# Altium PCB AC616.PcbDoc
Units mil, origin at the board's own origin, x right, y up, seen from the top; angles counter-clockwise.
Board outline 2953.76 x 2520.69 mil, 8 copper layers (TOP, SGND, IN1, IN2, SVCC, IN3, SGND1, BOTTOM), stack 65.6 mil thick; 7 components, 274 nets, 189 pads, 0 vias.
Unrouted connection lines stored in the file: 36.
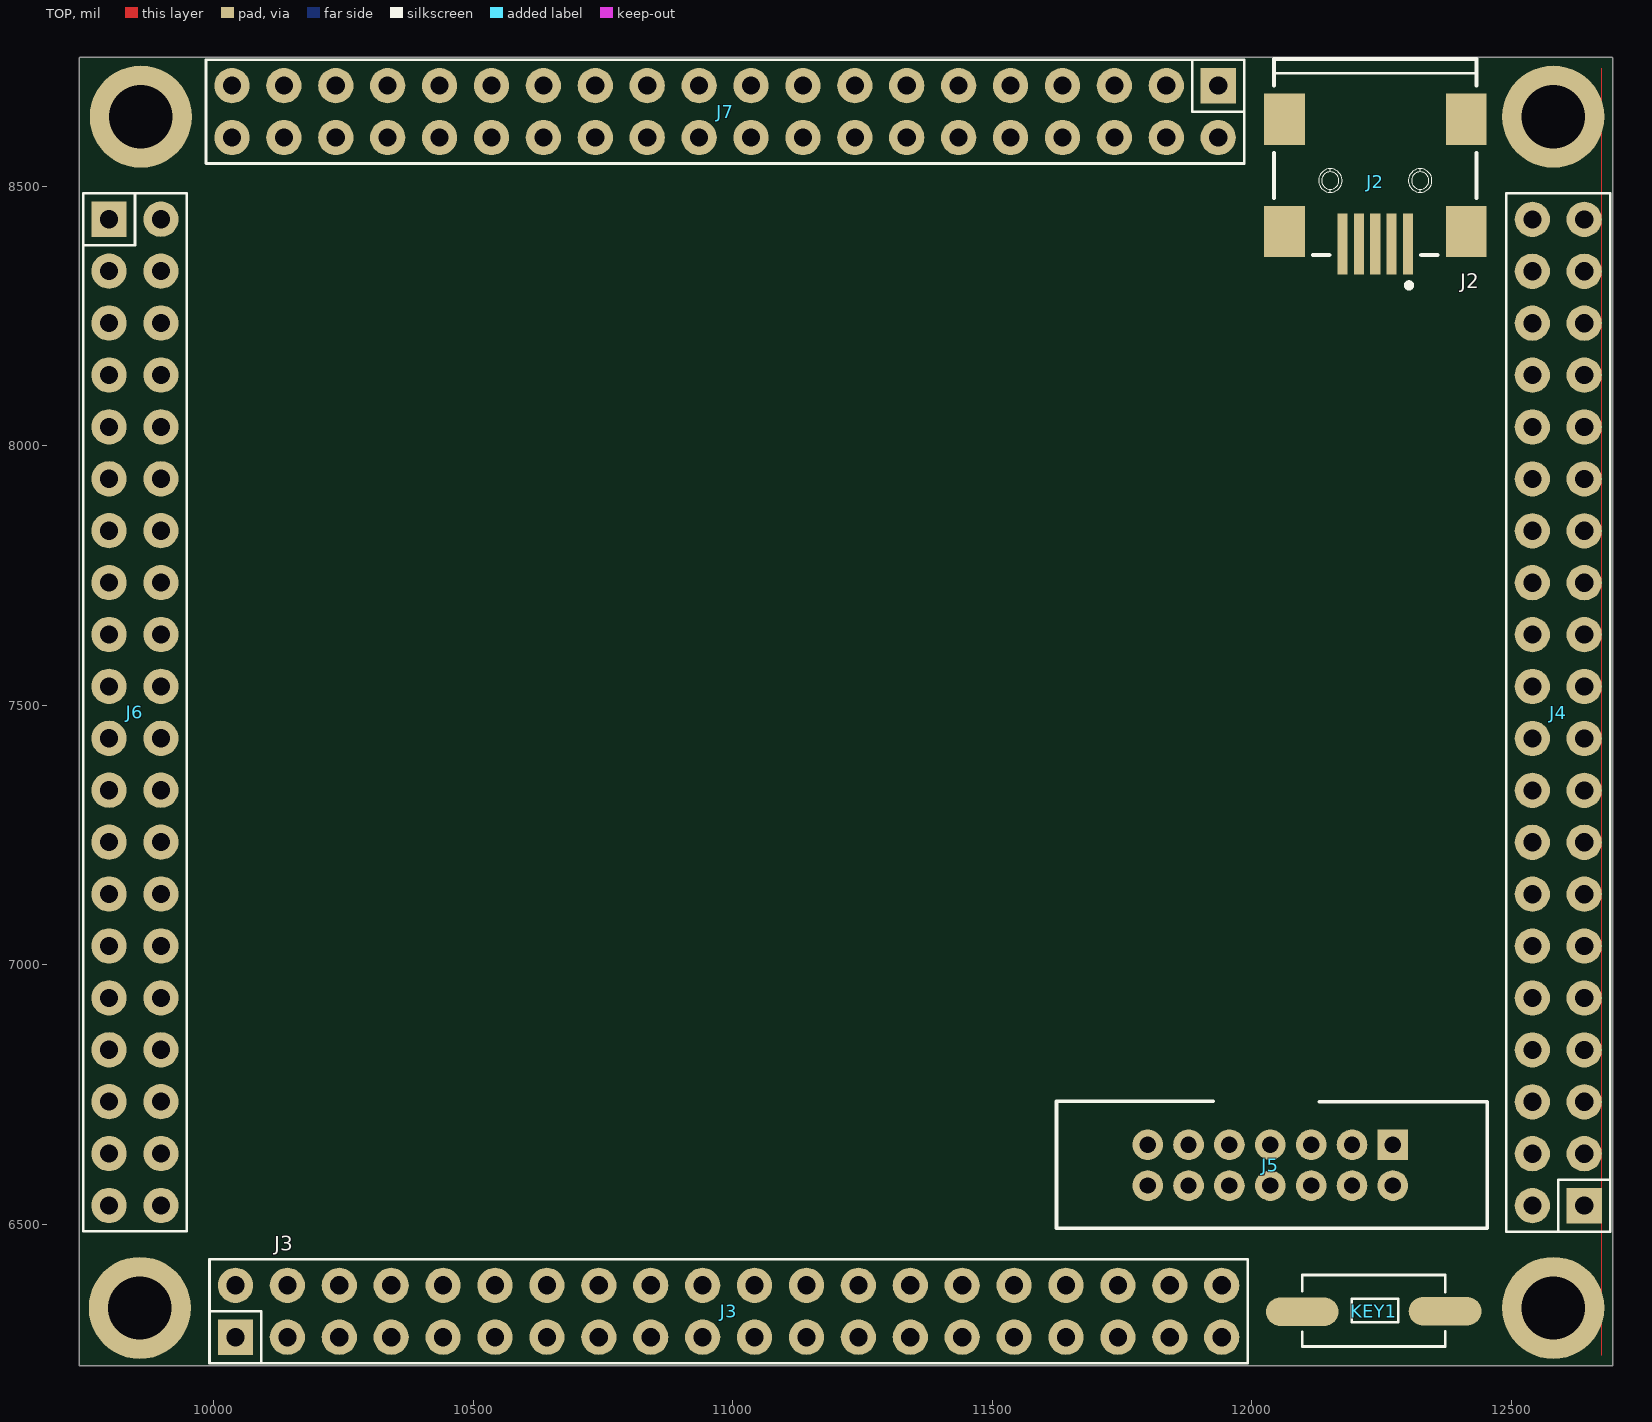
[diagram p0: TOP view]
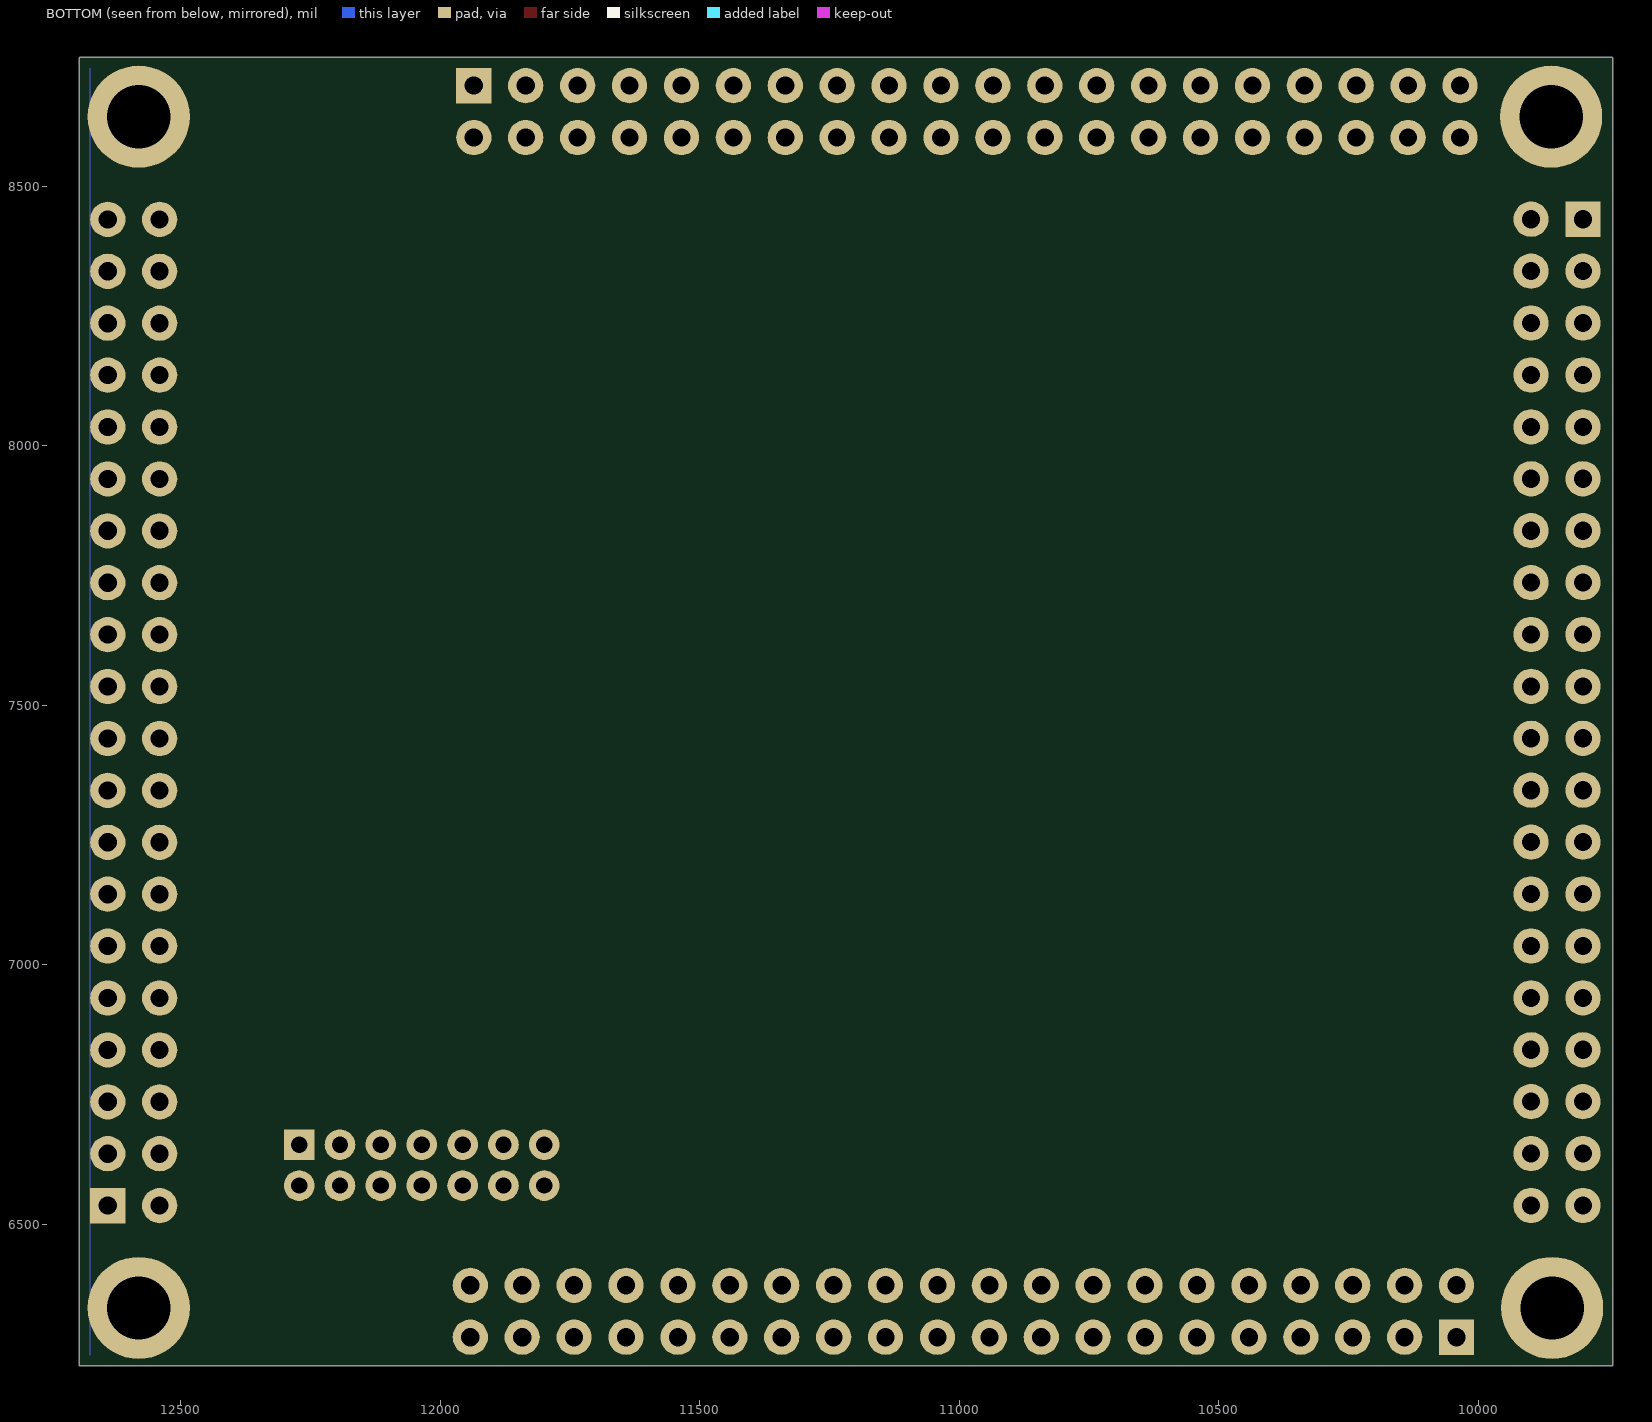
[diagram p1: BOTTOM view, seen from below]
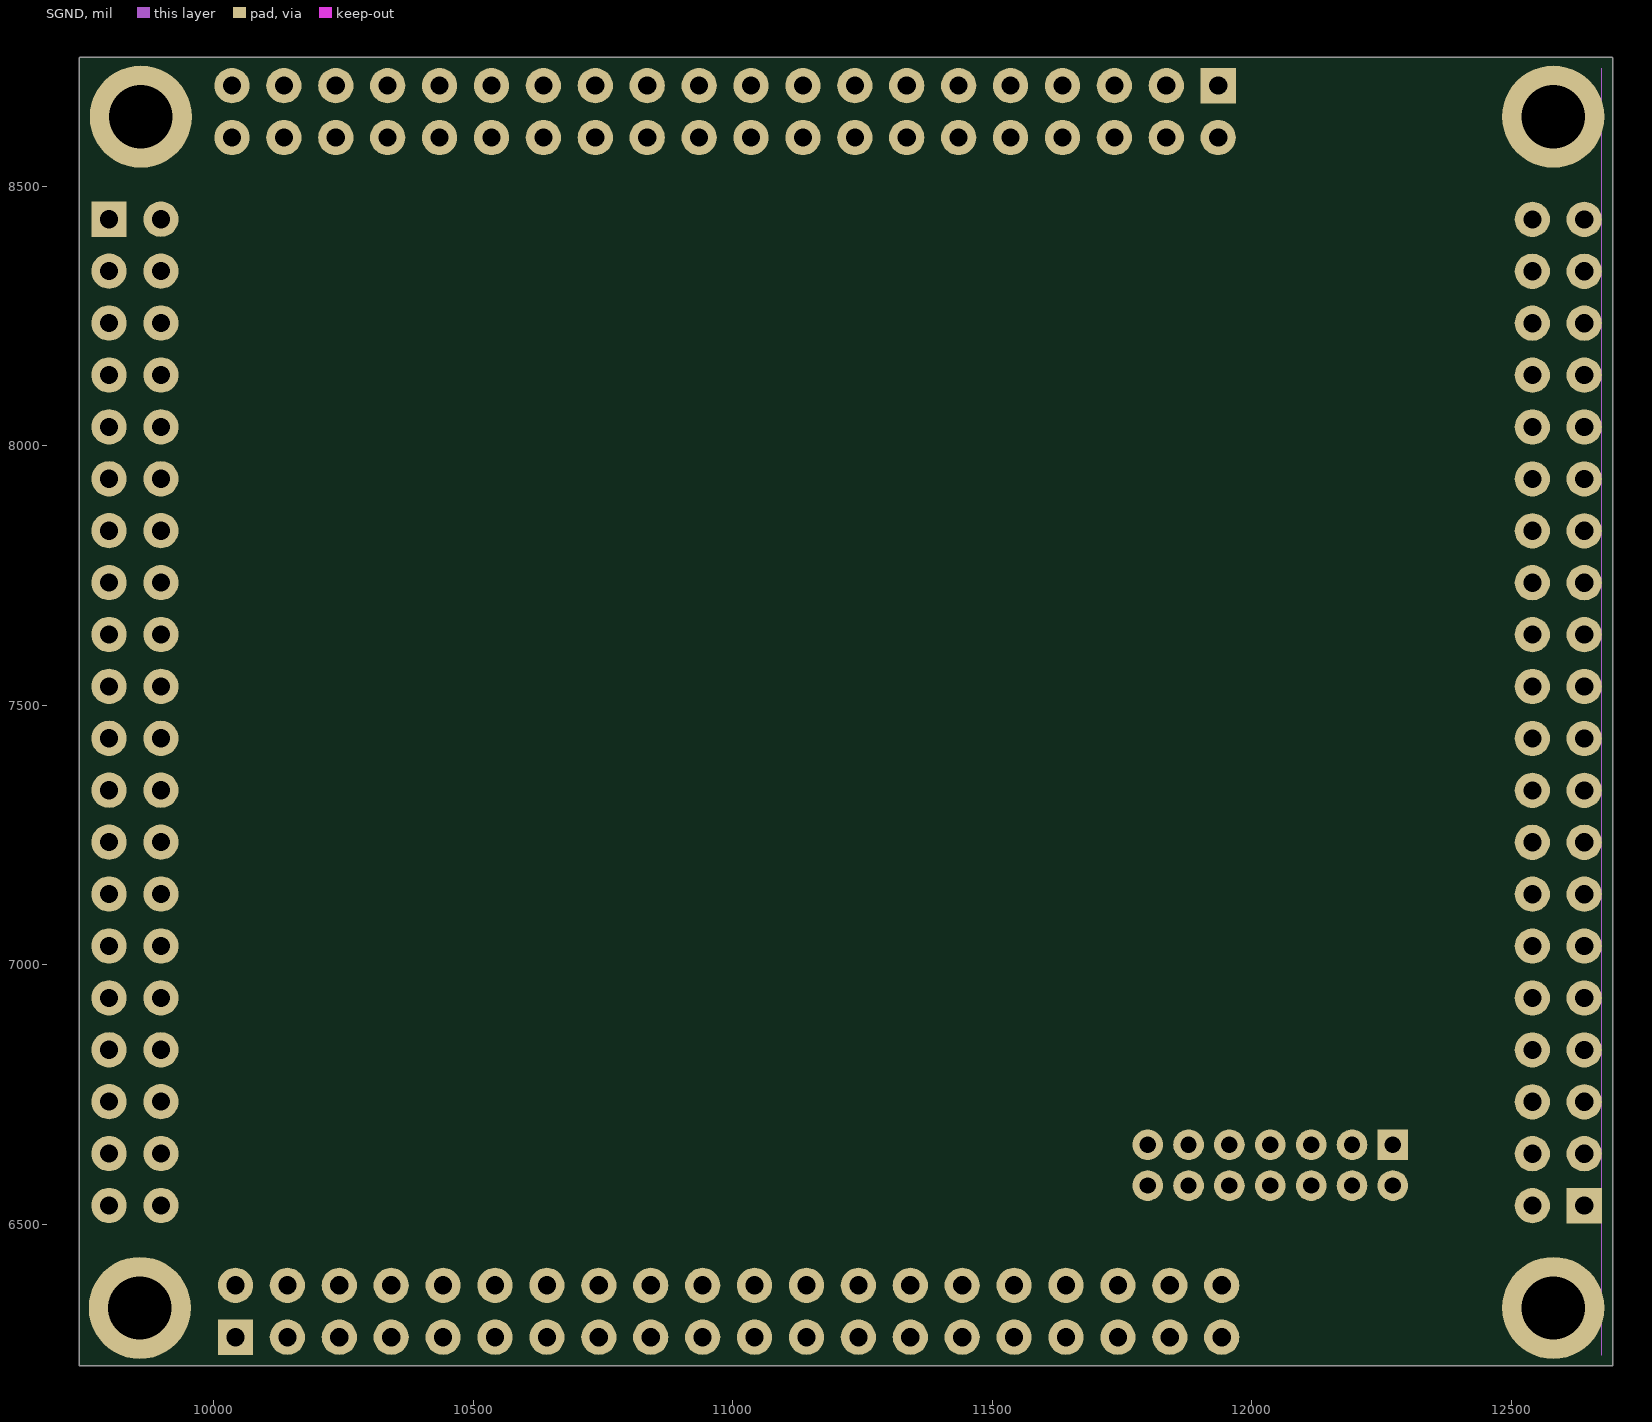
[diagram p2: SGND]
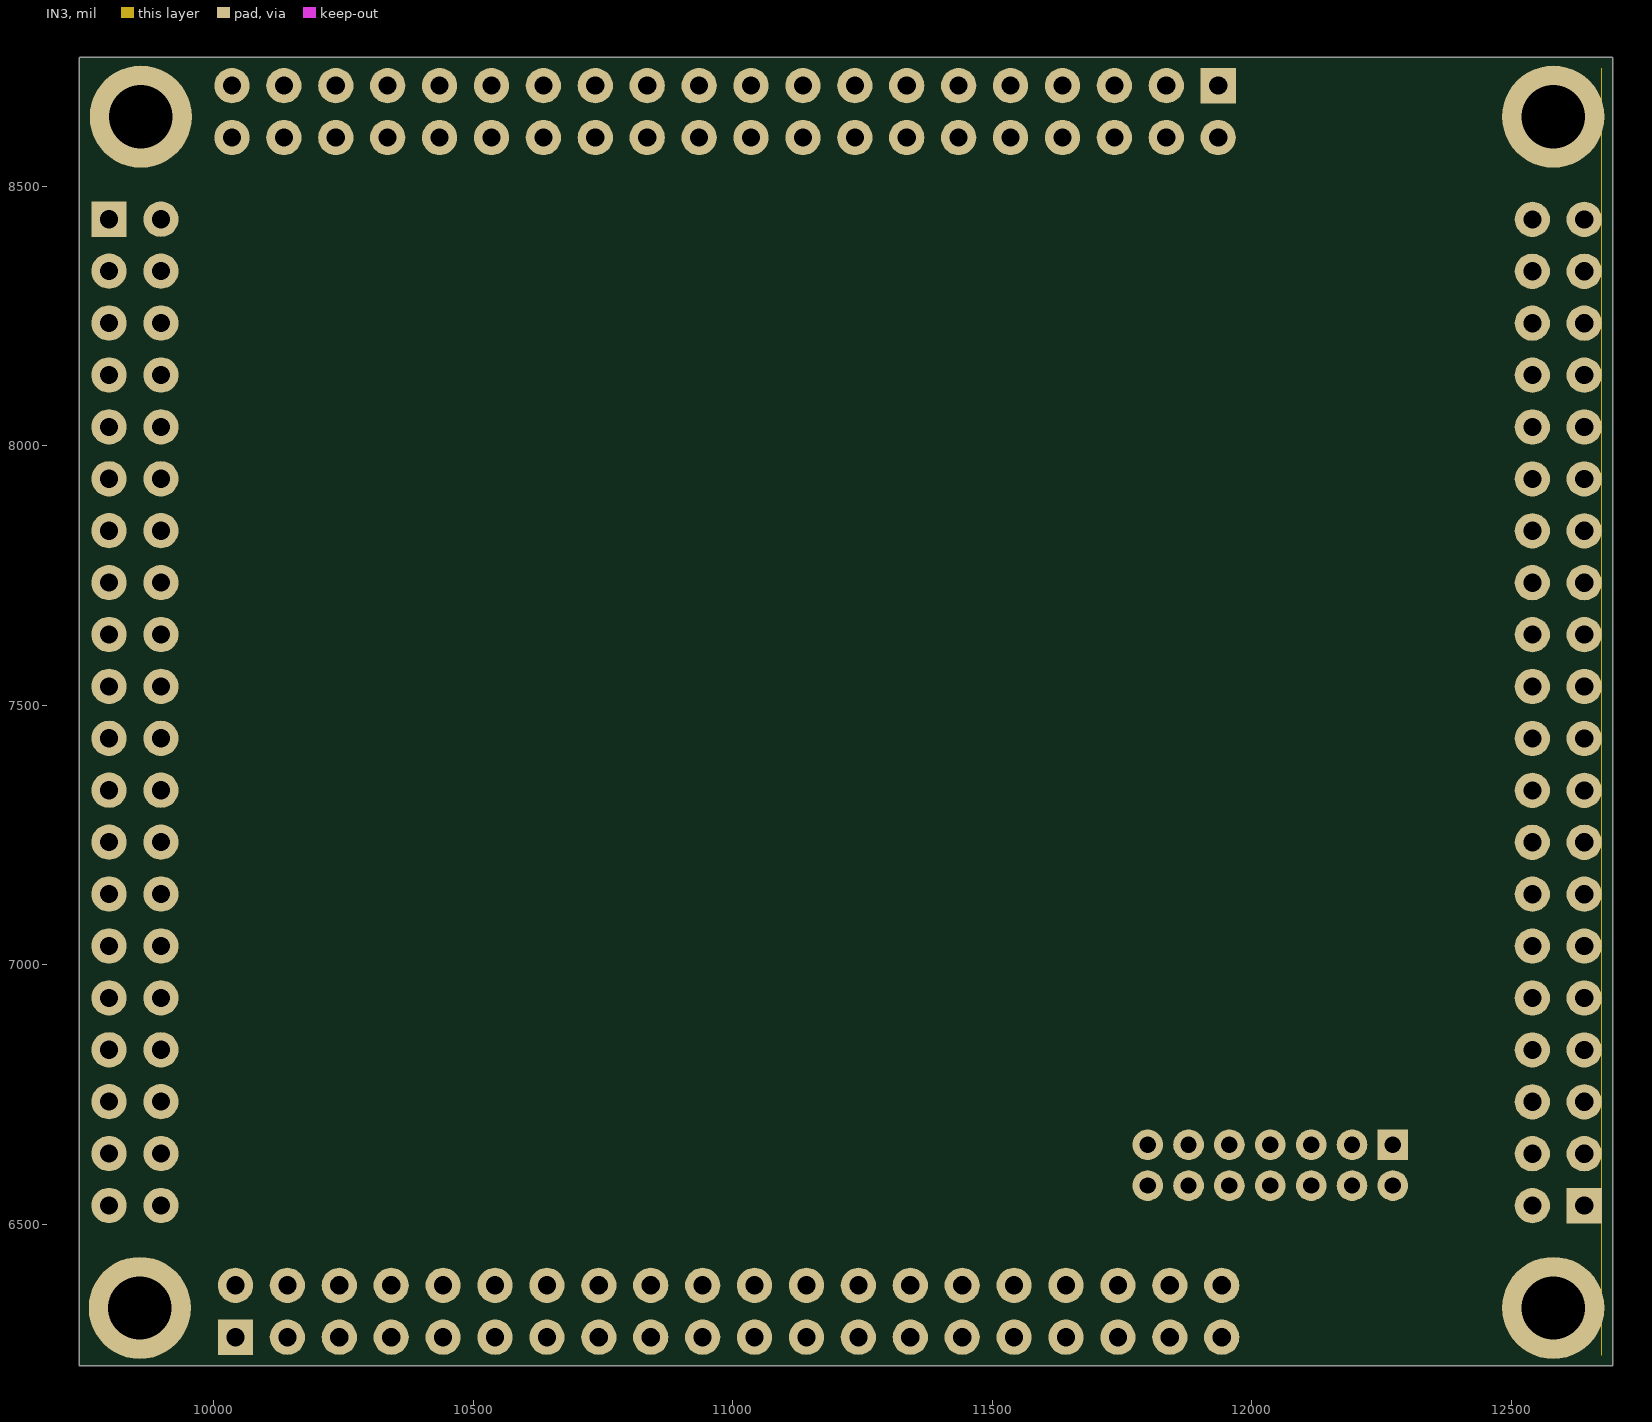
[diagram p3: IN3]
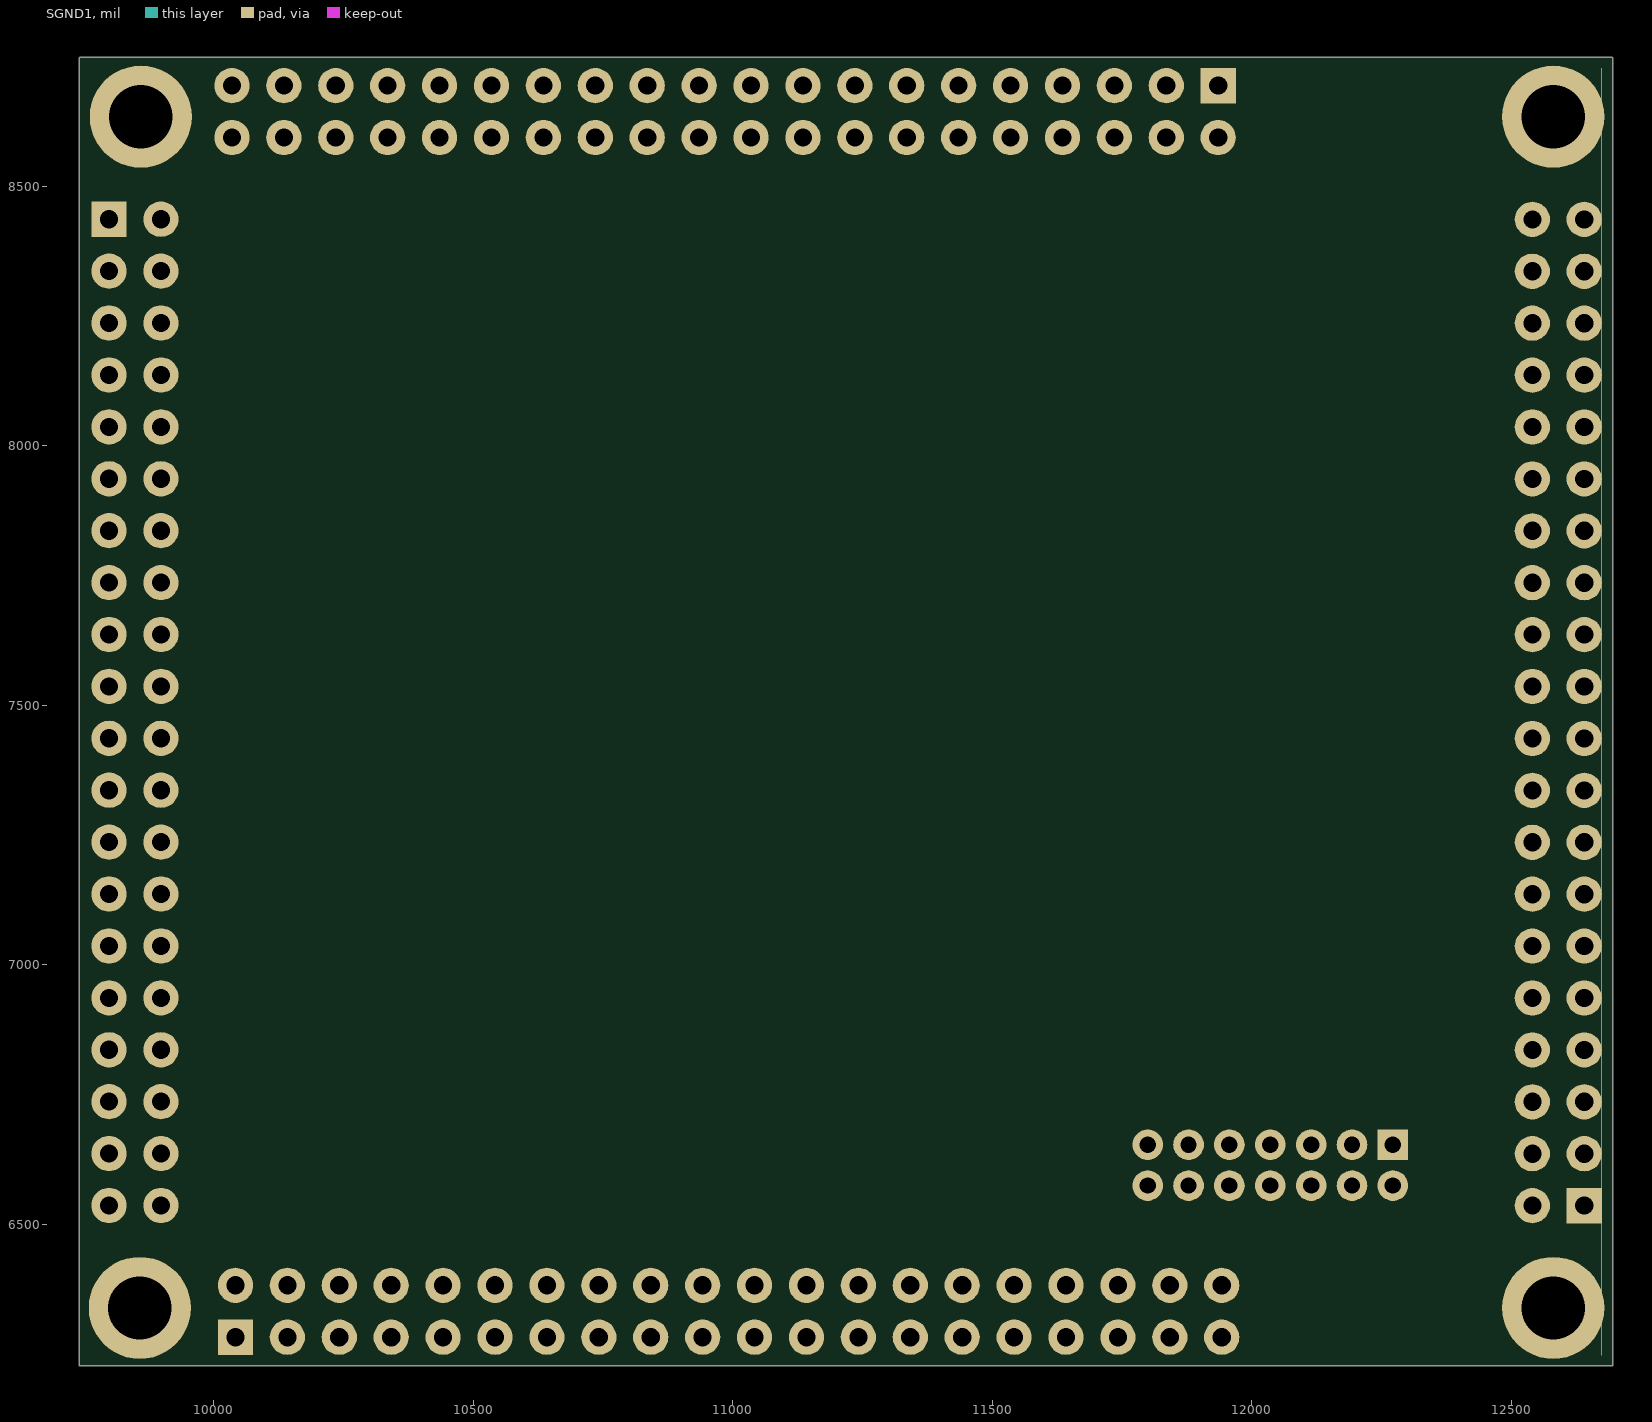
[diagram p4: SGND1]

## Layer stack, top to bottom
Top Solder: solder mask 0.4, Solder Resist, Dk 3.5
TOP: signal copper 1.2
Dielectric 1: core 8, FR-4, Dk 4.5
SGND: signal copper 1.2
Dielectric2: core 8, FR-4, Dk 4.5
IN1: signal copper 1.2
Dielectric3: core 8, FR-4, Dk 4.5
IN2: signal copper 1.2
Dielectric4: core 8, FR-4, Dk 4.5
SVCC: signal copper 1.2
Dielectric5: core 8, FR-4, Dk 4.5
IN3: signal copper 1.2
Dielectric6: core 8, FR-4, Dk 4.5
SGND1: signal copper 1.2
Dielectric7: core 8, FR-4, Dk 4.5
BOTTOM: signal copper 1.2
Bottom Solder: solder mask 0.4, Solder Resist, Dk 3.5

## Board outline
9741.5,6228 9742,6227.5 12694.76,6227.5 12695.26,6228 12695.26,8747.69 12694.76,8748.19 9742,8748.19 9741.5,8747.69

## Design rules (kind name [scope] priority, off if disabled: settings)
Clearance [All] p1: gap=10
PlaneConnect [All] p1: planeconnectstyle=Direct reliefexpansion=20 reliefentries=4 reliefconductorwidth=10 reliefairgap=10
PolygonConnect [All] p1: connectstyle=Direct reliefconductorwidth=10 reliefentries=4 polygonreliefangle="90 Angle" airgapwidth=10
RoutingVias [All] p1: holewidth=28 width=50 viastyle="Through Hole" minholewidth=28 minwidth=50 maxholewidth=28 maxwidth=50
SolderMaskExpansion [All] p1: expansion=4
Width [All] p1: maxlimit=10 minlimit=10 preferedwidth=10 impedancedriven=TRUE minimp=60.000000 maximp=60.000000 favimp=60.000000
29 further rules are at their usual default settings.

## Components (designator, comment, footprint, x,y, rotation, side; value= is the part's Value field where it differs from the comment)
J2 "USB_B_3_MINIUSBB_MINI_USB" MINIUSBB 12238,8504 r270 top
J3 "HEADER 20X2/M_IDC-40J_HEADER 20" IDC-40J 10992.2,6332.6 r0 top
J4 "HEADER 20X2/M_IDC-40J_HEADER 20" IDC-40J 12590.6,7486.1 r90 top
J5 "HEADER 7X2/SM_87831-1420-MOLEX_" 87831-1420-MOLEX 12039,6618.55 r270 top
J6 "HEADER 20X2/M_IDC-40J_HEADER 20" IDC-40J 9848.6,7486.4 r270 top
J7 "HEADER 20X2/M_IDC-40J_HEADER 20" IDC-40J 10985.4,8643.7 r180 top
KEY1 "BUTTON_0_KEY735SO_BUTTON" KEY735SO 12234.92,6333.57 r0 top

## Footprints (in the part's own frame and the unit in brackets; to place one, negate y for a bottom-side part, rotate by r counter-clockwise, add the part's x,y. Pads: shape width x height; smd on the part's side, far side on the other; paste and mask are expansions set on the pad)
87831-1420-MOLEX [mil] "87831-1420-MOLEX"
  rect 59.06x59.06 hole 31.5: 1(-34.95,233)
  round 59.06 hole 31.5: 2(43.79,233) 3(-34.95,154.26) 4(43.79,154.26) 5(-34.95,75.52) 6(43.79,75.52) 7(-34.95,-3.22) 8(43.79,-3.22) 9(-34.95,-81.96) 10(43.79,-81.96) 11(-34.95,-160.7) 12(43.79,-160.7) 13(-34.95,-239.44) 14(43.79,-239.44)
  silkscreen extent -119,-415 126,415
IDC-40J [mil] "IDC-40J"
  rect 68x68 hole 35: 1(-950,-50)
  round 68 hole 35: 2(-950,50) 3(-850,-50) 4(-850,50) 5(-750,-50) 6(-750,50) 7(-650,-50) 8(-650,50) 9(-550,-50) 10(-550,50) 11(-450,-50) 12(-450,50) 13(-350,-50) 14(-350,50) 15(-250,-50) 16(-250,50) 17(-150,-50) 18(-150,50) 19(-50,-50) 20(-50,50) 21(50,-50) 22(50,50) 23(150,-50) 24(150,50) 25(250,-50) 26(250,50) 27(350,-50) 28(350,50) 29(450,-50) 30(450,50) 31(550,-50) 32(550,50) 33(650,-50) 34(650,50) 35(750,-50) 36(750,50) 37(850,-50) 38(850,50) 39(950,-50) 40(950,50)
  silkscreen extent -1000,-100 1000,100
KEY735SO [mil] "KEY735SO"
  oval 140x55.12 smd: 1(-137.51,-1.9) 2(137.49,-0.9)
  silkscreen extent -138,-69 138,69
MINIUSBB [mm] "MINIUSBB"
  rect 3x0.5 smd: 1(2.925,1.6) 2(2.925,0.8) 3(2.925,0) 4(2.925,-0.8) 5(2.925,-1.6)
  rect 2.5x2 smd: 6(2.325,-4.45) 7(-3.175,-4.45) 8(2.325,4.45) 9(-3.175,4.45)
  silkscreen extent -6.12,-4.95 5.08,4.95

## Free pads (board coordinates)
  round 196.85 hole 122.05: 1(9858,6339) 1(9860,8634) 1(12581,6339) 1(12581,8634)

## Nets (pads, with @x,y where several pads share a name; then routed paths per layer and width w, separated by ;. In a path a pad name is that pad's centre, name@x,y a point inside that pad or via, vN(x,y) a via of type N, cw(c..) or ccw(c..) an arc to the next point about the centre after c; other vN are vias at no path point)
DDR3_A0: 
DDR3_A1: 
DDR3_A2: 
DDR3_A3: 
DDR3_A4: 
DDR3_A5: 
DDR3_A6: 
DDR3_A7: 
DDR3_A8: 
DDR3_A9: 
DDR3_A10: 
DDR3_A11: 
DDR3_A12: 
DDR3_A13: 
DDR3_A14: 
DDR3_BA0: 
DDR3_BA1: 
DDR3_BA2: 
DDR3_CAS_N: 
DDR3_CKE: 
DDR3_CLK_N: 
DDR3_CLK_P: 
DDR3_DQ0: 
DDR3_DQ1: 
DDR3_DQ2: 
DDR3_DQ3: 
DDR3_DQ4: 
DDR3_DQ5: 
DDR3_DQ6: 
DDR3_DQ7: 
DDR3_DQ8: 
DDR3_DQ9: 
DDR3_DQ10: 
DDR3_DQ11: 
DDR3_DQ12: 
DDR3_DQ13: 
DDR3_DQ14: 
DDR3_DQ15: 
DDR3_LDM: 
DDR3_LDQS_N: 
DDR3_LDQS_P: 
DDR3_ODT: 
DDR3_RAS_N: 
DDR3_RESET_N: 
DDR3_UDM: 
DDR3_UDQS_N: 
DDR3_UDQS_P: 
DDR3_VREF: 
DDR3_VTT: 
DDR3_WE_N: 
EPAD1: 
EPAD2: 
FPGA_CMPCS_B: 
FPGA_DONE: 
FPGA_M0: 
FPGA_M1: 
FPGA_ONCHIP_TERM1: 
FPGA_ONCHIP_TERM2: 
FPGA_TCK: 
FPGA_TDI: 
FPGA_TDO: 
FPGA_TMS: 
GND: J2.5 J2.6 J2.7 J2.8 J2.9 J3.1 J3.37 J3.38 J4.1 J4.37 J4.38 J5.1 J5.3 J5.5 J5.7 J5.9 J5.11 J5.13 J6.1 J6.37 J6.38 J7.1 J7.37 J7.38 KEY1.2
L1N_C4: J3.36
L1N_F16: J3.10
L1P_D4: J3.35
L1P_F15: J3.9
L2N_A2: J4.20
L2N_V16: 
L2P_B2: J4.19
L2P_U16: 
L3N_C6: J4.4
L3P_D6: J4.3
L4N_A3: J4.18
L4P_B3: J4.17
L5N_A4: J4.16
L5N_V15: 
L5P_B4: J4.15
L5P_U15: 
L6N_A5: J4.14
L6P_C5: J4.13
L8N_B6: J4.12
L8P_A6: J4.11
L10N_A7: J4.10
L10P_C7: J4.9
L11N_C8: J4.6
L11P_D8: J4.5
L14N_V13: 
L14P_U13: 
L15N_N11: 
L15P_M11: 
L16N_T11: 
L16P_R11: 
L19N_V12: 
L19P_T12: 
L20N_P11: J7.34
L20P_N10: J7.33
L22N_N9: J7.36
L22P_M10: J7.35
L23N_V11: J7.30
L23P_U11: J7.29
L29N_C18: J3.4
L29N_T10: J7.32
L29P_C17: J3.3
L29P_R10: J7.31
L30N_G14: J3.12
L30P_F14: J3.11
L31N_D18: J6.36
L31N_T8: J7.14
L31P_D17: J6.35
L31P_R8: J7.13
L32N_G13: J6.16
L32N_V9: J7.12
L32P_H12: J6.15
L32P_T9: J7.11
L33N_A8: J4.8
L33N_E18: J6.34
L33P_B8: J4.7
L33P_E16: J6.33
L34N_C9: J3.18
L34N_K13: J4.22
L34P_D9: J3.17
L34P_K12: J4.21
L35N_A9: J3.16
L35N_F18: J6.32
L35P_B9: J3.15
L35P_F17: J6.31
L36N_C11: J3.34
L36N_H14: J6.12
L36P_D11: J3.33
L36P_H13: J6.11
L37N_A10: J3.32
L37N_H16: J6.14
L37P_C10: J3.31
L37P_H15: J6.13
L38N_F9: J3.14
L38N_G18: J6.30
L38P_G9: J3.13
L38P_G16: J6.29
L39N_A11: J3.30
L39N_K14: J6.10
L39P_B11: J3.29
L39P_J13: J6.9
L40N_L13: J4.24
L40N_N8: J7.16
L40P_L12: J4.23
L40P_M8: J7.15
L41N_A12: J3.28
L41N_K16: J6.24
L41N_V8: J7.24
L41P_B12: J3.27
L41P_K15: J6.23
L41P_U8: J7.23
L42N_L16: J6.8
L42P_L15: J6.7
L43N_H18: J6.28
L43N_V7: J7.8
L43P_H17: J6.27
L43P_U7: J7.7
L44N_J18: J6.26
L44N_P8: J7.28
L44P_J16: J6.25
L44P_N7: J7.27
L45N_K18: J6.22
L45N_V6: J7.6
L45P_K17: J6.21
L45P_T6: J7.5
L46N_L18: J6.20
L46N_T7: J7.10
L46P_L17: J6.19
L46P_R7: J7.9
L47N_M18: J6.18
L47N_P7: J7.26
L47P_M16: J6.17
L47P_N6: J7.25
L48N_N18: J6.6
L48N_T5: J7.22
L48P_N17: J6.5
L48P_R5: J7.21
L49N_P18: J6.4
L49N_V5: J7.20
L49P_P17: J6.3
L49P_U5: J7.19
L50N_A13: J3.26
L50N_N16: J4.30
L50P_C13: J3.25
L50P_N15: J4.29
L51N_T18: J4.36
L51P_T17: J4.35
L52N_U18: J4.34
L52P_U17: J4.33
L53N_N14: J4.28
L53P_M14: J4.27
L61N_M13: J4.26
L61P_L14: J4.25
L62N_A14: J3.24
L62N_T3: J7.18
L62P_B14: J3.23
L62P_R3: J7.17
L63N_E13: J3.20
L63P_F13: J3.19
L64N_A15: J3.8
L64N_P6: J7.4
L64P_C15: J3.7
L64P_N5: J7.3
L65N_C14: J3.22
L65P_D14: J3.21
L66N_A16: J3.6
L66P_B16: J3.5
L74N_P16: J4.32
L74P_P15: J4.31
N17037588: J2.2
N17038651: J2.3
N17042963: 
N17052686: 
N17414523: 
N17414541: 
N18216687: 
N18381994: 
N18388857: 
N18392450: 
N18515716: 
N18516511: 
N18517311: 
N18518116: 
N18543755: 
N18547996: 
N18548831: 
N18559278: 
N18559996: 
N18561623: 
N18574265: 
N18581644: 
N18581650: 
N18581662: 
N18581680: 
N18581746: 
N18581778: 
N18581794: 
N19724919: 
N20802522: 
N20802699: 
N20802701: 
N20803911: 
N20803913: 
N20803936: 
N20803958: 
N20804045: 
N20804070: 
N20804153: 
N20849525: 
N20850889: 
N20903770: 
N20959727: J5.4
N20959730: J5.6
N20959733: J5.8
N20959736: J5.10
N20960686: KEY1.1
N21081105: 
N21081402: 
N21081615: 
N21221049: 
QSPI_CLK: 
QSPI_CS: 
QSPI_MISO0: 
QSPI_MISO1: 
QSPI_MISO2: 
QSPI_MISO3: 
V10: 
VCC1V2: 
VCC1V5: 
VCC3V3: J3.39 J3.40 J4.39 J4.40 J5.2 J6.39 J6.40 J7.39 J7.40
VCC5V: J2.1 J3.2 J4.2 J6.2 J7.2
VCCIO3V3: 
pads on no net: J2.4 J5.12 J5.14

## Other copper
SGND:
  pour cut-out: 11974.76,8593.7 11973.42,8603.89 11969.48,8613.38 11963.23,8621.53 11955.08,8627.78 11945.59,8631.72 11935.4,8633.06 11925.21,8631.72 11915.72,8627.78 11907.57,8621.53 11901.32,8613.38 11897.38,8603.89 11896.04,8593.7 11897.38,8583.51 11901.32,8574.02 11907.57,8565.87 11915.72,8559.62 11925.21,8555.68 11935.4,8554.34 11945.59,8555.68 11955.08,8559.62 11963.23,8565.87 11969.48,8574.02 11973.42,8583.51 11974.76,8593.7
IN3:
  pour cut-out: 11974.76,8593.7 11973.42,8603.89 11969.48,8613.38 11963.23,8621.53 11955.08,8627.78 11945.59,8631.72 11935.4,8633.06 11925.21,8631.72 11915.72,8627.78 11907.57,8621.53 11901.32,8613.38 11897.38,8603.89 11896.04,8593.7 11897.38,8583.51 11901.32,8574.02 11907.57,8565.87 11915.72,8559.62 11925.21,8555.68 11935.4,8554.34 11945.59,8555.68 11955.08,8559.62 11963.23,8565.87 11969.48,8574.02 11973.42,8583.51 11974.76,8593.7
SGND1:
  pour cut-out: 11974.76,8593.7 11973.42,8603.89 11969.48,8613.38 11963.23,8621.53 11955.08,8627.78 11945.59,8631.72 11935.4,8633.06 11925.21,8631.72 11915.72,8627.78 11907.57,8621.53 11901.32,8613.38 11897.38,8603.89 11896.04,8593.7 11897.38,8583.51 11901.32,8574.02 11907.57,8565.87 11915.72,8559.62 11925.21,8555.68 11935.4,8554.34 11945.59,8555.68 11955.08,8559.62 11963.23,8565.87 11969.48,8574.02 11973.42,8583.51 11974.76,8593.7
Multi-Layer:
  lines w1: 12674.76,6248 12674.76,8727.69

## Silkscreen, mask and mechanical layers (free items; w line width, h text height)
DIMENSION-1:
  lines w1: 9742,6040 9892,6065 ; 9742,6040 9892,6015 ; 9742,6040 10771.95,6040 9742,6040 ; 9742,6040 9892,6065 ; 9742,6040 9892,6015 ; 9892,6015 9892,6065 ; 9892,6015 9892,6065 ; 12544.8,6015 12694.8,6040 ; 12544.8,6015 12544.8,6065 ; 12544.8,6015 12694.8,6040 ; 12544.8,6015 12544.8,6065 ; 12544.8,6065 12694.8,6040 ; 12544.8,6065 12694.8,6040 ; 12694.8,6040 11548.45,6040 12694.8,6040 ; 13032.2,6378.5 13057.2,6228.5 ; 13032.2,6378.5 13082.2,6378.5 ; 13032.2,6378.5 13057.2,6228.5 ; 13032.2,6378.5 13082.2,6378.5 ; 13032.2,8597.8 13057.2,8747.8 ; 13032.2,8597.8 13082.2,8597.8 ; 13032.2,8597.8 13057.2,8747.8 ; 13032.2,8597.8 13082.2,8597.8 ; 13057.2,6228.5 13082.2,6378.5 ; 13057.2,6228.5 13057.2,7259.15 13057.2,6228.5 ; 13057.2,6228.5 13082.2,6378.5 ; 13057.2,8747.8 13082.2,8597.8 ; 13057.2,8747.8 13057.2,7571.65 13057.2,8747.8 ; 13057.2,8747.8 13082.2,8597.8 ; 9742,5940 9742,6138.8 9742,5940 ; 12694.8,5940 12694.8,6128.5 12694.8,5940 ; 12778.1,6228.5 13157.2,6228.5 12778.1,6228.5 ; 12785.8,8747.8 13157.2,8747.8 12785.8,8747.8
  text "64MM" at 12762.7,7352.9 h125
  text "64MM" at 12762.7,7352.9 h125
  text "75MM" at 10865.7,5977.5 h125
  text "75MM" at 10865.7,5977.5 h125
OUTLINE:
  lines w1: 9742,6228 12694.76,6228 12694.76,8747.69 9742,8747.69 9742,6228
PIN_NUMBER:
  text "1" at 12571,8634 h25
  text "1" at 12571,6339 h25
PLACE_BOUND_TOP:
  region: 9733,6214 9983,6214 9983,6464 9733,6464
  region: 12456,6214 12706,6214 12706,6464 12456,6464
  region: 9735,8509 9985,8509 9985,8759 9735,8759
  region: 12456,8509 12706,8509 12706,8759 12456,8759
ASSEMBLY_TOP:
  lines w1: 9733,6214 9733,6464 ; 12456,8509 12456,8759 12706,8759 12706,8509 ; 12456,6214 12706,6214 12706,6464 12456,6464 12456,6214
  text "U*" at 12561,8622 h25
  text "U*" at 12561,6327 h25

## Text inside footprints (layer, text, board x,y; h text height)
J2: PIN_NUMBER "1" at 12290.99,8388.84 h25 r270; PIN_NUMBER "3" at 12228,8388.84 h25 r270; PIN_NUMBER "2" at 12259.5,8388.84 h25 r270; PIN_NUMBER "5" at 12165.01,8388.84 h25 r270; PIN_NUMBER "6" at 12052.8,8412.46 h25 r270; PIN_NUMBER "7" at 12052.8,8629 h25 r270; PIN_NUMBER "9" at 12403.2,8629 h25 r270; PIN_NUMBER "8" at 12403.2,8412.46 h25 r270; PIN_NUMBER "4" at 12196.5,8388.84 h25 r270
J3: PIN_NUMBER "35" at 11722.2,6282.6 h25; PIN_NUMBER "36" at 11722.2,6382.6 h25; PIN_NUMBER "17" at 10822.2,6282.6 h25; PIN_NUMBER "18" at 10822.2,6382.6 h25; PIN_NUMBER "15" at 10722.2,6282.6 h25; PIN_NUMBER "16" at 10722.2,6382.6 h25; PIN_NUMBER "33" at 11622.2,6282.6 h25; PIN_NUMBER "34" at 11622.2,6382.6 h25; PIN_NUMBER "31" at 11522.2,6282.6 h25; PIN_NUMBER "32" at 11522.2,6382.6 h25; PIN_NUMBER "13" at 10622.2,6282.6 h25; PIN_NUMBER "14" at 10622.2,6382.6 h25; PIN_NUMBER "29" at 11422.2,6282.6 h25; PIN_NUMBER "30" at 11422.2,6382.6 h25; PIN_NUMBER "27" at 11322.2,6282.6 h25; PIN_NUMBER "28" at 11322.2,6382.6 h25; PIN_NUMBER "25" at 11222.2,6282.6 h25; PIN_NUMBER "26" at 11222.2,6382.6 h25; PIN_NUMBER "9" at 10432.2,6282.6 h25; PIN_NUMBER "10" at 10422.2,6382.6 h25; PIN_NUMBER "3" at 10132.2,6282.6 h25; PIN_NUMBER "4" at 10132.2,6382.6 h25; PIN_NUMBER "11" at 10522.2,6282.6 h25; PIN_NUMBER "12" at 10522.2,6382.6 h25; PIN_NUMBER "23" at 11122.2,6282.6 h25; PIN_NUMBER "21" at 11022.2,6282.6 h25; PIN_NUMBER "22" at 11022.2,6382.6 h25; PIN_NUMBER "5" at 10232.2,6282.6 h25; PIN_NUMBER "6" at 10232.2,6382.6 h25; PIN_NUMBER "8" at 10332.2,6382.6 h25; PIN_NUMBER "7" at 10332.2,6282.6 h25; PIN_NUMBER "20" at 10922.2,6382.6 h25; PIN_NUMBER "19" at 10922.2,6282.6 h25; PIN_NUMBER "24" at 11122.2,6382.6 h25; PIN_NUMBER "2" at 10032.2,6382.6 h25; PIN_NUMBER "39" at 11922.2,6282.6 h25; PIN_NUMBER "40" at 11922.2,6382.6 h25; PIN_NUMBER "1" at 10032.2,6282.6 h25; PIN_NUMBER "37" at 11822.2,6282.6 h25; PIN_NUMBER "38" at 11822.2,6382.6 h25
J4: PIN_NUMBER "19" at 12620.6,7436.1 h25 r90; PIN_NUMBER "20" at 12520.6,7436.1 h25 r90; PIN_NUMBER "3" at 12630.6,6636.1 h25 r90; PIN_NUMBER "4" at 12530.6,6636.1 h25 r90; PIN_NUMBER "17" at 12620.6,7336.1 h25 r90; PIN_NUMBER "18" at 12520.6,7336.1 h25 r90; PIN_NUMBER "15" at 12620.6,7236.1 h25 r90; PIN_NUMBER "16" at 12520.6,7236.1 h25 r90; PIN_NUMBER "13" at 12620.6,7136.1 h25 r90; PIN_NUMBER "14" at 12520.6,7136.1 h25 r90; PIN_NUMBER "12" at 12520.6,7036.1 h25 r90; PIN_NUMBER "11" at 12620.6,7036.1 h25 r90; PIN_NUMBER "9" at 12630.6,6936.1 h25 r90; PIN_NUMBER "10" at 12520.6,6936.1 h25 r90; PIN_NUMBER "5" at 12630.6,6736.1 h25 r90; PIN_NUMBER "6" at 12530.6,6736.1 h25 r90; PIN_NUMBER "7" at 12630.6,6836.1 h25 r90; PIN_NUMBER "8" at 12530.6,6836.1 h25 r90; PIN_NUMBER "21" at 12620.6,7536.1 h25 r90; PIN_NUMBER "22" at 12520.6,7536.1 h25 r90; PIN_NUMBER "23" at 12620.6,7636.1 h25 r90; PIN_NUMBER "24" at 12520.6,7636.1 h25 r90; PIN_NUMBER "29" at 12620.6,7936.1 h25 r90; PIN_NUMBER "30" at 12520.6,7936.1 h25 r90; PIN_NUMBER "35" at 12620.6,8236.1 h25 r90; PIN_NUMBER "36" at 12520.6,8236.1 h25 r90; PIN_NUMBER "33" at 12620.6,8136.1 h25 r90; PIN_NUMBER "34" at 12520.6,8136.1 h25 r90; PIN_NUMBER "27" at 12620.6,7836.1 h25 r90; PIN_NUMBER "28" at 12520.6,7836.1 h25 r90; PIN_NUMBER "25" at 12620.6,7736.1 h25 r90; PIN_NUMBER "26" at 12520.6,7736.1 h25 r90; PIN_NUMBER "31" at 12620.6,8036.1 h25 r90; PIN_NUMBER "32" at 12520.6,8036.1 h25 r90; PIN_NUMBER "2" at 12530.6,6536.1 h25 r90; PIN_NUMBER "40" at 12520.6,8436.1 h25 r90; PIN_NUMBER "39" at 12620.6,8436.1 h25 r90; PIN_NUMBER "1" at 12630.6,6536.1 h25 r90; PIN_NUMBER "37" at 12620.6,8336.1 h25 r90; PIN_NUMBER "38" at 12520.6,8336.1 h25 r90
J5: PIN_NUMBER "2" at 12262,6574.76 h25 r270; PIN_NUMBER "13" at 11779.56,6653.5 h25 r270; PIN_NUMBER "1" at 12262,6653.5 h25 r270; PIN_NUMBER "11" at 11858.3,6653.5 h25 r270; PIN_NUMBER "9" at 11947.04,6653.5 h25 r270; PIN_NUMBER "7" at 12025.78,6653.5 h25 r270; PIN_NUMBER "5" at 12104.52,6653.5 h25 r270; PIN_NUMBER "3" at 12183.26,6653.5 h25 r270; PIN_NUMBER "6" at 12104.52,6574.76 h25 r270; PIN_NUMBER "8" at 12025.78,6574.76 h25 r270; PIN_NUMBER "10" at 11937.04,6574.76 h25 r270; PIN_NUMBER "4" at 12183.26,6574.76 h25 r270; PIN_NUMBER "14" at 11779.56,6574.76 h25 r270; PIN_NUMBER "12" at 11858.3,6574.76 h25 r270
J6: PIN_NUMBER "35" at 9778.6,6736.4 h25 r270; PIN_NUMBER "36" at 9878.6,6736.4 h25 r270; PIN_NUMBER "15" at 9778.6,7736.4 h25 r270; PIN_NUMBER "16" at 9878.6,7736.4 h25 r270; PIN_NUMBER "33" at 9778.6,6836.4 h25 r270; PIN_NUMBER "34" at 9878.6,6836.4 h25 r270; PIN_NUMBER "31" at 9778.6,6936.4 h25 r270; PIN_NUMBER "32" at 9878.6,6936.4 h25 r270; PIN_NUMBER "11" at 9778.6,7936.4 h25 r270; PIN_NUMBER "12" at 9878.6,7936.4 h25 r270; PIN_NUMBER "13" at 9778.6,7836.4 h25 r270; PIN_NUMBER "14" at 9878.6,7836.4 h25 r270; PIN_NUMBER "29" at 9778.6,7036.4 h25 r270; PIN_NUMBER "30" at 9878.6,7036.4 h25 r270; PIN_NUMBER "9" at 9788.6,8036.4 h25 r270; PIN_NUMBER "10" at 9878.6,8036.4 h25 r270; PIN_NUMBER "23" at 9778.6,7336.4 h25 r270; PIN_NUMBER "24" at 9878.6,7336.4 h25 r270; PIN_NUMBER "7" at 9788.6,8136.4 h25 r270; PIN_NUMBER "8" at 9888.6,8136.4 h25 r270; PIN_NUMBER "27" at 9778.6,7136.4 h25 r270; PIN_NUMBER "28" at 9878.6,7136.4 h25 r270; PIN_NUMBER "25" at 9778.6,7236.4 h25 r270; PIN_NUMBER "26" at 9878.6,7236.4 h25 r270; PIN_NUMBER "21" at 9778.6,7436.4 h25 r270; PIN_NUMBER "22" at 9878.6,7436.4 h25 r270; PIN_NUMBER "19" at 9778.6,7536.4 h25 r270; PIN_NUMBER "20" at 9878.6,7536.4 h25 r270; PIN_NUMBER "17" at 9778.6,7636.4 h25 r270; PIN_NUMBER "18" at 9878.6,7636.4 h25 r270; PIN_NUMBER "5" at 9788.6,8236.4 h25 r270; PIN_NUMBER "6" at 9888.6,8236.4 h25 r270; PIN_NUMBER "3" at 9788.6,8336.4 h25 r270; PIN_NUMBER "4" at 9888.6,8336.4 h25 r270; PIN_NUMBER "2" at 9888.6,8436.4 h25 r270; PIN_NUMBER "40" at 9878.6,6536.4 h25 r270; PIN_NUMBER "39" at 9778.6,6536.4 h25 r270; PIN_NUMBER "37" at 9778.6,6636.4 h25 r270; PIN_NUMBER "38" at 9878.6,6636.4 h25 r270; PIN_NUMBER "1" at 9788.6,8436.4 h25 r270
J7: PIN_NUMBER "33" at 10315.4,8693.7 h25 r180; PIN_NUMBER "34" at 10315.4,8593.7 h25 r180; PIN_NUMBER "35" at 10215.4,8693.7 h25 r180; PIN_NUMBER "36" at 10215.4,8593.7 h25 r180; PIN_NUMBER "29" at 10515.4,8693.7 h25 r180; PIN_NUMBER "30" at 10515.4,8593.7 h25 r180; PIN_NUMBER "31" at 10415.4,8693.7 h25 r180; PIN_NUMBER "32" at 10415.4,8593.7 h25 r180; PIN_NUMBER "13" at 11315.4,8693.7 h25 r180; PIN_NUMBER "14" at 11315.4,8593.7 h25 r180; PIN_NUMBER "11" at 11415.4,8693.7 h25 r180; PIN_NUMBER "12" at 11415.4,8593.7 h25 r180; PIN_NUMBER "15" at 11215.4,8693.7 h25 r180; PIN_NUMBER "16" at 11215.4,8593.7 h25 r180; PIN_NUMBER "23" at 10815.4,8693.7 h25 r180; PIN_NUMBER "24" at 10815.4,8593.7 h25 r180; PIN_NUMBER "7" at 11625.4,8693.7 h25 r180; PIN_NUMBER "8" at 11625.4,8593.7 h25 r180; PIN_NUMBER "27" at 10615.4,8693.7 h25 r180; PIN_NUMBER "28" at 10615.4,8593.7 h25 r180; PIN_NUMBER "5" at 11725.4,8693.7 h25 r180; PIN_NUMBER "6" at 11725.4,8593.7 h25 r180; PIN_NUMBER "9" at 11525.4,8693.7 h25 r180; PIN_NUMBER "10" at 11515.4,8593.7 h25 r180; PIN_NUMBER "25" at 10715.4,8693.7 h25 r180; PIN_NUMBER "26" at 10715.4,8593.7 h25 r180; PIN_NUMBER "21" at 10915.4,8693.7 h25 r180; PIN_NUMBER "22" at 10915.4,8593.7 h25 r180; PIN_NUMBER "19" at 11015.4,8693.7 h25 r180; PIN_NUMBER "20" at 11015.4,8593.7 h25 r180; PIN_NUMBER "17" at 11115.4,8693.7 h25 r180; PIN_NUMBER "18" at 11115.4,8593.7 h25 r180; PIN_NUMBER "3" at 11825.4,8693.7 h25 r180; PIN_NUMBER "4" at 11825.4,8593.7 h25 r180; PIN_NUMBER "2" at 11925.4,8593.7 h25 r180; PIN_NUMBER "40" at 10015.4,8593.7 h25 r180; PIN_NUMBER "39" at 10015.4,8693.7 h25 r180; PIN_NUMBER "37" at 10115.4,8693.7 h25 r180; PIN_NUMBER "38" at 10115.4,8593.7 h25 r180; PIN_NUMBER "1" at 11925.4,8693.7 h25 r180
KEY1: PIN_NUMBER "2" at 12362.42,6332.67 h25; PIN_NUMBER "1" at 12087.41,6331.67 h25